# Altium PCB mainPCB_24V_placement helper.PcbDoc
Units mm, origin at the board's own origin, x right, y up, seen from the top; angles counter-clockwise.
Board outline 65 x 32.8 mm, 2 copper layers (Top Layer, Bottom Layer); 73 components, 60 nets, 344 pads, 6 vias.
Unrouted connection lines stored in the file: 2.
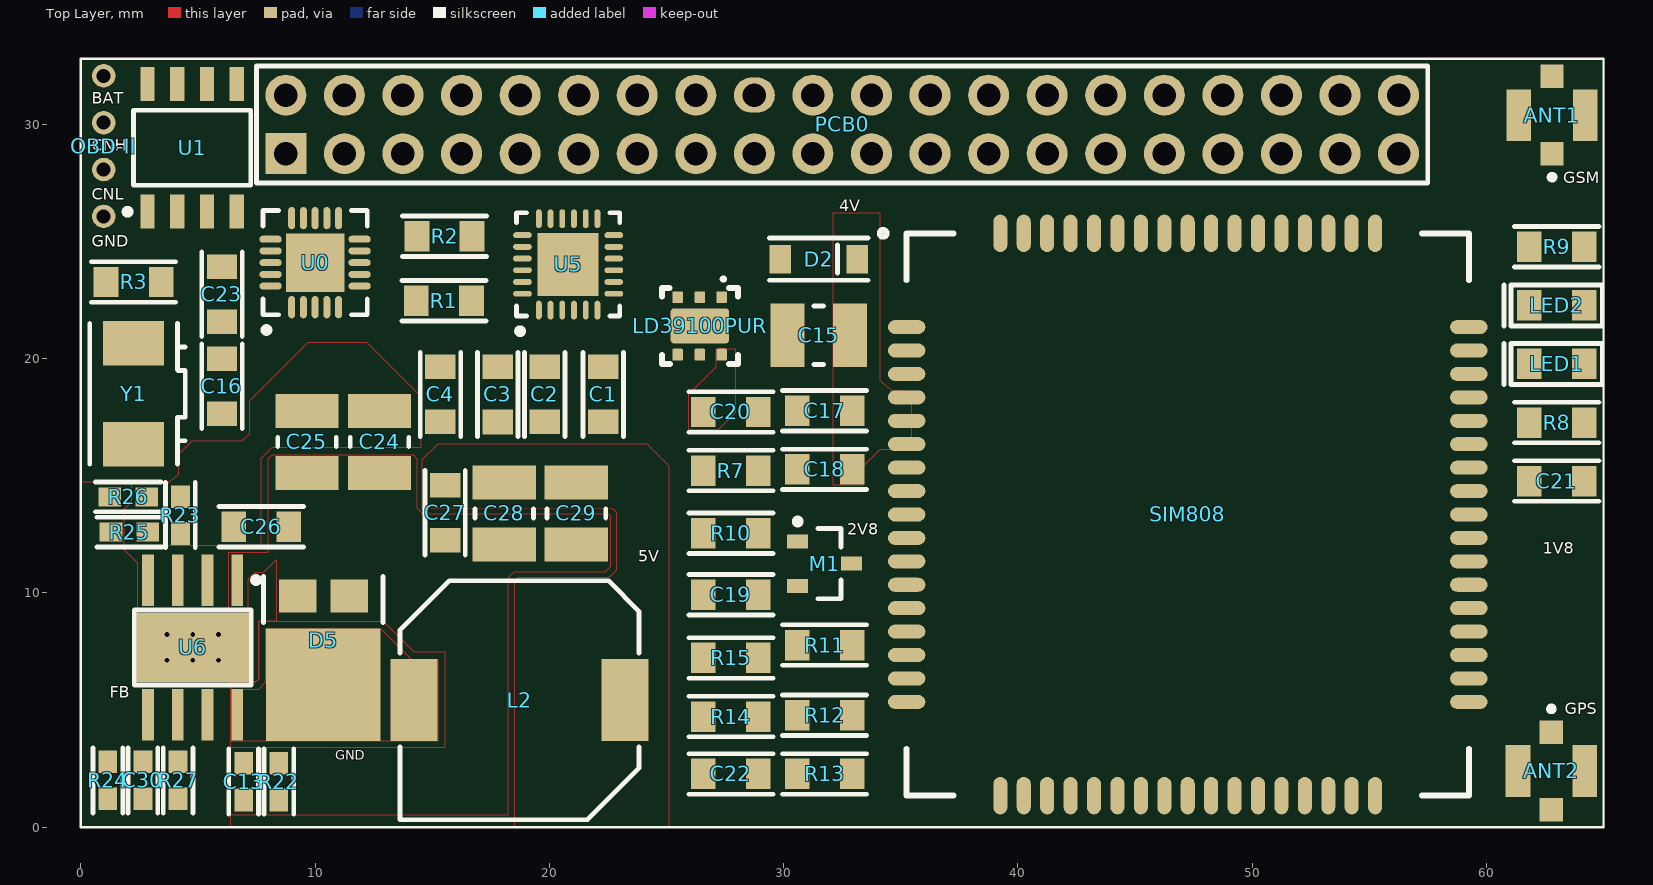
[diagram p0: Top Layer view]
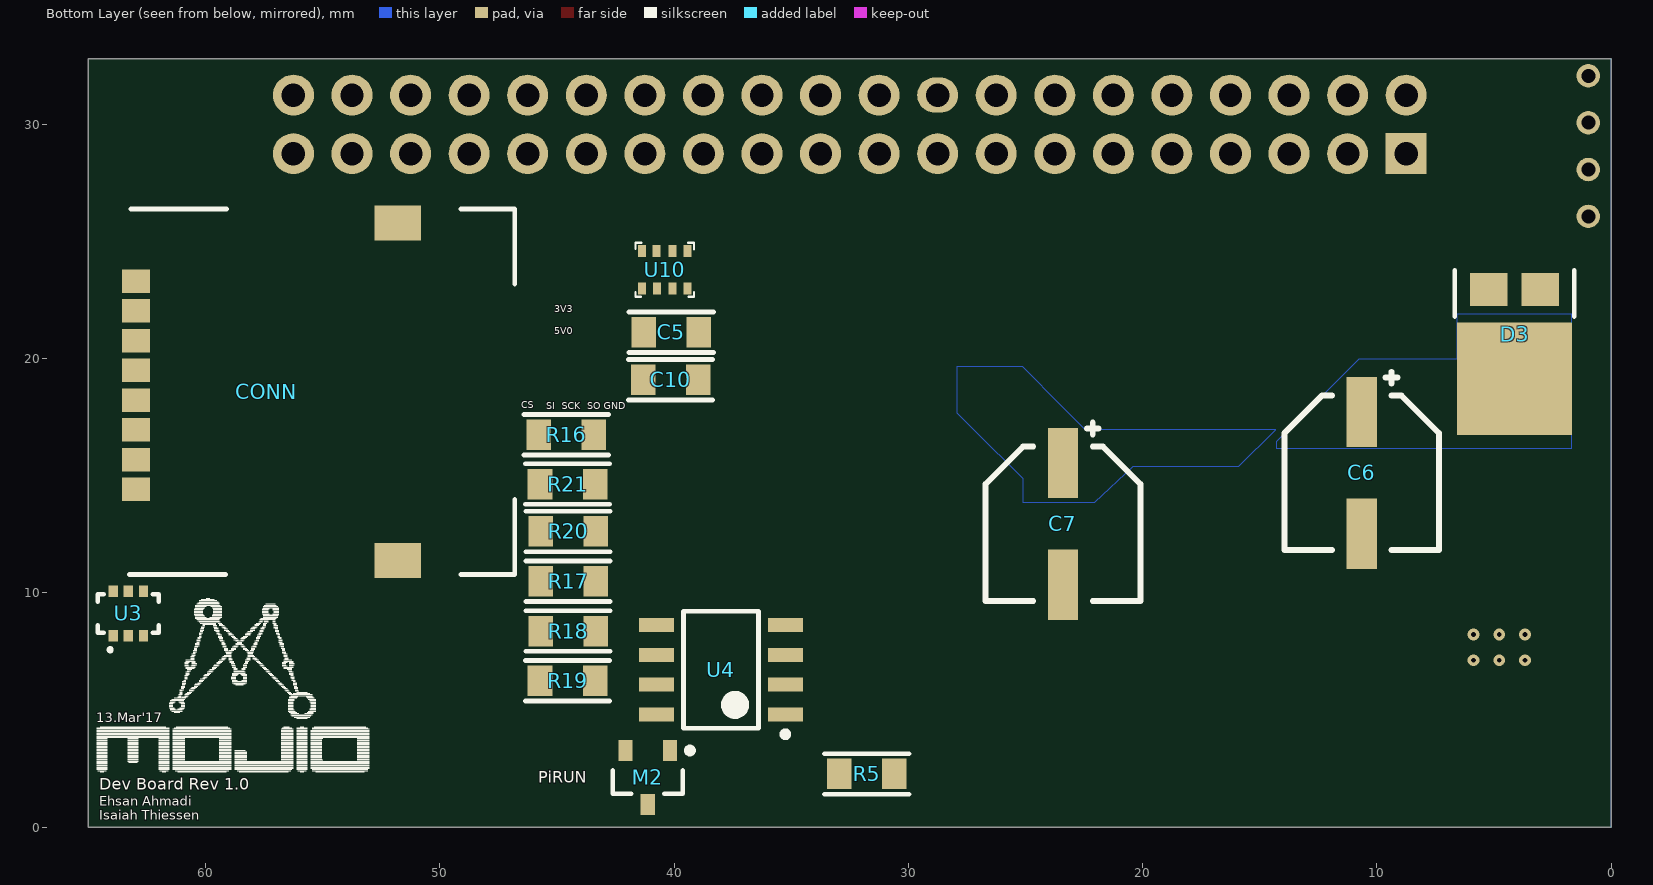
[diagram p1: Bottom Layer view, seen from below]

## Layer stack, top to bottom
Top Solder: solder mask 0.0102, Solder Resist, Dk 3.5
Top Layer: signal copper 0.0356
Dielectric 1: dielectric 0.32, FR-4, Dk 4.8
Bottom Layer: signal copper 0.0356
Bottom Solder: solder mask 0.0102, Solder Resist, Dk 3.5

## Board outline
0,0 0,32.8 65,32.8 65,0

## Design rules (kind name [scope] priority, off if disabled: settings)
Clearance [All] p1: gap=0.16
HoleSize [All] p1: absolutevalues=TRUE maxlimit=6.3 minlimit=0.2 maxpercent=80.000 minpercent=20.000
MinimumAnnularRing [All] p1: minimumring=0.15
PolygonConnect [All] p1: connectstyle=Direct reliefconductorwidth=0.254 reliefentries=4 polygonreliefangle="90 Angle" airgapwidth=0.254
RoutingVias [All] p1: holewidth=0.2 width=0.5 viastyle="Through Hole" minholewidth=0.2 minwidth=0.5 maxholewidth=10 maxwidth=10
SolderMaskExpansion [All] p1: expansion=0.102
Width [All] p1: maxlimit=12 minlimit=0.16 preferedwidth=0.2
29 further rules are at their usual default settings.

## Classes and differential pairs
component class PowerCircuit_24V: C6 C7 C13 C24 C25 C26 C27 C28 C29 C30 D5 L2 R22 R23 R24 R25 R26 R27 U6
component class SIM808: ANT1 ANT2 C15 C17 C18 C19 C20 C21 C22 CONN D2 LD39100PUR LED1 LED2 M1 R7 R8 R9 R10 R11 R12 R13 R14 R15 SIM808 U3
component class MPU6050: C1 C2 C3 C4 R1 R2 U5
component class CanNode: C16 C23 D3 OBD-II PCB0 R3 U0 U1 Y1
component class ATtiny: M2 R5 R16 R17 R18 R19 R20 R21 U4
component class bmp280_i2c: C5 C10 U10

## Components (designator, comment, footprint, x,y, rotation, side; value= is the part's Value field where it differs from the comment)
ANT1 "antenna" uFL 60.8,29.25 r0 top
ANT2 "antenna" uFL 64.775,3.55 r180 top
C1 "Generic Capacitor" 0805 22.275,18.475 r90 top
C2 "Generic Capacitor" 0805 19.775,18.475 r90 top
C3 "Generic Capacitor" 0805 17.825,18.475 r270 top
C4 "Generic Capacitor" 0805 15.325,18.475 r90 top
C5 "Generic Capacitor" 0805 40.125,21.15 r180 bottom
C6 "47uF, 25V" "Cap 6.3mm dia 5.4mm Height" 10.65,15.125 r180 bottom
C7 "47uF, 25V" "Cap 6.3mm dia 5.4mm Height" 23.4,12.95 r180 bottom
C10 "Generic Capacitor" 0805 40.15,19.125 r180 bottom
C13 "Generic Capacitor" 0603 6.95,1.95 r270 top
C15 "Cap Cer 100uF" "Cap 1210" 31.5,21 r180 top
C16 "Generic Capacitor" 0805 6,18.825 r90 top
C17 "Generic Capacitor" 0805 31.75,17.75 r180 top
C18 "Generic Capacitor" 0805 31.75,15.25 r180 top
C19 "Generic Capacitor" 0805 27.75,9.95 r0 top
C20 "Generic Capacitor" 0805 27.75,17.75 r0 top
C21 "Generic Capacitor" 0805 63,14.75 r180 top
C22 "Generic Capacitor" 0805 27.75,2.25 r180 top
C23 "Generic Capacitor" 0805 6,22.75 r90 top
C24 "Generic Capacitor" "Cap 1210" 12.75,16.45 r270 top
C25 "Generic Capacitor" "Cap 1210" 9.65,16.45 r270 top
C26 "Generic Capacitor" 0805 7.7,12.85 r0 top
C27 "Generic Capacitor" 0805 15.575,13.425 r270 top
C28 "Generic Capacitor" "Cap 1210" 18.075,13.4 r270 top
C29 "Generic Capacitor" "Cap 1210" 21.15,13.4 r270 top
C30 "Generic Capacitor" 0603 2.65,2 r90 top
CONN "CONN SMART CARD" "CONN SMART CARD" 55.1,18.59 r270 bottom
D2 "Diode Zener" "Diode Zener" 31.5,24.25 r0 top
D3 "DIODE SCHOTTKY 60V 5A" TO277A 4.125,19.15 r0 bottom
D5 "DIODE SCHOTTKY 60V 5A" TO277A 10.35,6.075 r180 top
L2 "FIXED IND 6.8UH 5.2A" 7447714068 18.725,5.425 r270 top
LD39100PUR "LD39100PUR" LD39100PUR 26.425,21.4 r180 top
LED1 "Led Red" "0805 LED" 63,19.75 r180 top
LED2 "Led Green" "0805 LED" 63,22.25 r180 top
M1 "N-CH Mosfet Switch" SOT32-3 31.75,11.25 r0 top
M2 "N-CH Mosfet Switch" SOT32-3 41.125,2.125 r270 bottom
OBD-II "OBD-II" OBD_II 0.975,29.075 r0 top
PCB0 "Rasberry Pi footprint" "Rasberry PI" 32.5,30 r0 top
R1 "Resistor" 0805 15.5,22.45 r180 top
R2 "Resistor" 0805 15.525,25.2 r180 top
R3 "Resistor" 0805 2.25,23.25 r180 top
R5 "Resistor" 0805 31.775,2.3 r180 bottom
R7 "Resistor" 0805 27.75,15.25 r0 top
R8 "Resistor" 0805 63,17.25 r180 top
R9 "Resistor" 0805 63,24.75 r180 top
R10 "Resistor" 0805 27.75,12.575 r0 top
R11 "Resistor" 0805 31.75,7.75 r180 top
R12 "Resistor" 0805 31.75,4.75 r180 top
R13 "Resistor" 0805 31.75,2.25 r180 top
R14 "Resistor" 0805 27.75,4.75 r0 top
R15 "Resistor" 0805 27.75,7.25 r0 top
R16 "Resistor" 0805 44.6,16.775 r180 bottom
R17 "Resistor" 0805 44.525,10.525 r180 bottom
R18 "Resistor" 0805 44.525,8.4 r180 bottom
R19 "Resistor" 0805 44.55,6.275 r180 bottom
R20 "Resistor" 0805 44.525,12.65 r180 bottom
R21 "Resistor" 0805 44.55,14.675 r180 bottom
R22 "Resistor" 0603 8.45,1.95 r270 top
R23 "Resistor" 0603 4.25,13.325 r90 top
R24 "Resistor" 0603 1.15,2 r90 top
R25 "Resistor" 0603 2.075,12.6 r0 top
R26 "Resistor" 0603 2.025,14.1 r0 top
R27 "Resistor" 0603 4.15,2 r270 top
SIM808 "SIM808" SIM808 47.25,13.35 r0 top
U0 "MCP2515" MCP2515 10,24.1 r90 top
U1 "TCAN332" SOIC-8 4.75,29 r90 top
U3 "TVS Diode" SMF05CT2G 63.3,9.125 r90 bottom
U4 "ATtiny13A" ATtiny13A 38,6.725 r0 bottom
U5 "MPU6050" MPU-6050 20.8,24.025 r90 top
U6 "LMR16030" LMR16030 4.775,7.675 r270 top
U10 "BMP280" bmp280_i2c 41.65,24.8 r270 bottom
Y1 "XTAL" XTAL-16.000 2.25,18.5 r270 top

## Footprints (in the part's own frame and the unit in brackets; to place one, negate y for a bottom-side part, rotate by r counter-clockwise, add the part's x,y. Pads: shape width x height; smd on the part's side, far side on the other; paste and mask are expansions set on the pad)
0603 [mm]
  rect 0.965x0.8 smd: 1(-0.787,0) 2(0.788,0)
  silkscreen extent -1.4,-0.64 1.4,0.64, body extent -0.8,-0.4 0.8,0.4, height 0.5
0805 [mm] "0805 SMD"
  rect 1.05x1.3 smd: 1(-1.174,-0.025) 2(1.175,-0.025)
  silkscreen extent -1.8,-0.89 1.8,0.84, body extent -1.45,-0.68 1.47,0.63, height 0.64
"0805 LED" [mm] "0805 SMD LED"
  rect 1.05x1.3 smd: 1(1.175,-0.025) 2(-1.174,-0.025)
  silkscreen extent -1.95,-0.9 2.25,0.85, body extent -1.45,-0.68 1.47,0.63, height 0.64
7447714068 [mm] "Fixed Inductor 6.8uH 5A"
  rect 3.5x2 smd: 0(0,4.5) 1(0,-4.5)
  silkscreen extent -5.1,-5.1 5.1,5.1, body extent -5,-5 5,5, height 4.8
ATtiny13A [mm]
  rect 1.5x0.6 smd: 1(-2.75,1.905) 2(-2.75,0.635) 3(-2.75,-0.635) 4(-2.75,-1.905) 5(2.75,-1.905) 6(2.75,-0.635) 7(2.75,0.635) 8(2.75,1.905)
  silkscreen extent -2.87,-2.5 1.6,2.88, body extent -3.02,-2.5 3.02,2.5, height 1.75
bmp280_i2c [mm] "pressure sensor"
  rect 0.5x0.35 smd: CSB(1.8,1.575) GND(0.2,1.575) GND(1.8,2.225) SCK(1.8,0.275) SDI(1.8,0.925) SDO(0.2,0.275) VDD(0.2,2.225) VDDIO(0.2,0.9)
  silkscreen extent -0.15,0 2.15,2.5, body extent 0,0 2.01,2.49, height 1
"Cap 6.3mm dia 5.4mm Height" [mm] "Cap 6.3mm dia 5.4mm Height"
  rect 1.3x3 smd: 1(0,2.6) 2(0,-2.6)
  silkscreen extent -3.3,-3.3 3.3,4.32, body extent -3.15,-3.15 3.15,3.15, height 5.3
"Cap 1210" [mm] "1210 (3225m)"
  rect 1.45x2.7 smd: 1(-1.325,0) 2(1.325,0)
  silkscreen extent -0.2,-1.25 0.2,1.25, body extent -1.7,-1.35 1.7,1.35, height 2.5
"CONN SMART CARD" [mm] "Micro Sim connector"
  rect 1x1.2 smd: 1(-4.725,-7.875) 2(-2.185,-7.875) 3(0.355,-7.875) 4(2.895,-7.875) 5(-3.455,-7.875) 6(-0.915,-7.875) 7(1.625,-7.875) 8(4.165,-7.875)
  rect 1.5x2 smd: *(-7.2,3.3) *(7.2,3.3)
  silkscreen extent -7.8,-8.15 7.8,8.3, body extent -7.7,-8.15 7.7,8.15, height 1.9
"Diode Zener" [mm]
  rect 0.91x1.22 smd: 1(1.637,0) 2(-1.637,0)
  silkscreen extent -2.1,-0.9 2.1,0.9, body extent -2,-0.8 2,0.8, height 1.2
LD39100PUR [mm]
  rrect20% 0.45x0.5 smd: 1(-0.925,-1.225) 2(0,-1.225) 3(0.95,-1.225) 4(0.95,1.225) 5(0,1.225) 6(-0.925,1.225)
  rrect20% 2.5x1.5 smd: 2(0,0)
  silkscreen extent -1.63,-2.02 1.63,1.62, body extent -1.5,-1.5 1.5,1.5, height 1
LMR16030 [mm]
  rect 2.2x0.5 smd: 1(-2.875,1.905) 2(-2.875,0.635) 3(-2.875,-0.635) 4(-2.875,-1.905) 5(2.875,-1.905) 6(2.875,-0.635) 7(2.875,0.635) 8(2.875,1.905)
  rect 2.95x4.9 smd: 9(0,0)
  silkscreen extent -3,-2.5 1.6,2.83, body extent -3.02,-2.5 3.02,2.5, height 1.75
MCP2515 [mm] "IC CAN CTLR W/SPI 2.0B 20-QFN"
  oval 0.95x0.3 smd: 1(-1.9,1) 2(-1.9,0.5) 3(-1.9,0) 4(-1.9,-0.5) 5(-1.9,-1) 11(1.9,-1) 12(1.9,-0.5) 13(1.9,0) 14(1.9,0.5) 15(1.9,1)
  oval 0.3x0.95 smd: 6(-1,-1.9) 7(-0.5,-1.9) 8(0,-1.9) 9(0.5,-1.9) 10(1,-1.9) 16(1,1.9) 17(0.5,1.9) 18(0,1.9) 19(-0.5,1.9) 20(-1,1.9)
  rect 2.5x2.5 smd: 21(0,0)
  silkscreen extent -3,-2.23 2.23,2.22, body extent -2.12,-2.12 2.13,2.13, height 1
MPU-6050 [mm]
  oval 0.8x0.25 smd: 1(-1.95,1.25) 2(-1.95,0.75) 3(-1.95,0.25) 4(-1.95,-0.25) 5(-1.95,-0.75) 6(-1.95,-1.25) 13(1.95,-1.25) 14(1.95,-0.75) 15(1.95,-0.25) 16(1.95,0.25) 17(1.95,0.75) 18(1.95,1.25)
  oval 0.25x0.8 smd: 7(-1.25,-1.95) 8(-0.75,-1.95) 9(-0.25,-1.95) 10(0.25,-1.95) 11(0.75,-1.95) 12(1.25,-1.95) 19(1.25,1.95) 20(0.75,1.95) 21(0.25,1.95) 22(-0.25,1.95) 23(-0.75,1.95) 24(-1.25,1.95)
  rect 2.7x2.6 smd: 25(0,0)
  silkscreen extent -2.97,-2.2 2.2,2.2, body extent -2.05,-2.05 2.05,2.05, height 0.95
OBD_II [mm]
  round 1 hole 0.6: 1(0,3) 2(0,1) 3(0,-1) 4(0,-3)
"Rasberry PI" [mm] "Rasberry PI footprint"
  rect 1.75x1.75 hole 1: 1(-23.75,-1.25)
  round 1.75 hole 1: 2(-23.75,1.25) 3(-21.25,-1.25) 4(-21.25,1.25) 5(-18.75,-1.25) 6(-18.75,1.25) 7(-16.25,-1.25) 8(-16.25,1.25) 9(-13.75,-1.25) 10(-13.75,1.25) 11(-11.25,-1.25) 12(-11.25,1.25) 13(-8.75,-1.25) 14(-8.75,1.25) 15(-6.25,-1.25) 16(-6.25,1.25) 17(-3.75,-1.25) 19(-1.25,-1.25) 20(-1.25,1.25) 21(1.25,-1.25) 22(1.25,1.25) 23(3.75,-1.25) 24(3.75,1.25) 25(6.25,-1.25) 26(6.25,1.25) 27(8.75,-1.25) 28(8.75,1.25) 29(11.25,-1.25) 30(11.25,1.25) 31(13.75,-1.25) 32(13.75,1.25) 33(16.25,-1.25) 34(16.25,1.25) 35(18.75,-1.25) 36(18.75,1.25) 37(21.25,-1.25) 38(21.25,1.25) 39(23.75,-1.25) 40(23.75,1.25)
  oval 1.75x1.5 hole 1: 18(-3.75,1.25)
  silkscreen extent -25,-2.5 25,2.5
SIM808 [mm]
  oval 1.6x0.6 smd: 1(-12,8) 2(-12,7) 3(-12,6) 4(-12,5) 5(-12,4) 6(-12,3) 7(-12,2) 8(-12,1) 9(-12,0) 10(-12,-1) 11(-12,-2) 12(-12,-3) 13(-12,-4) 14(-12,-5) 15(-12,-6) 16(-12,-7) 17(-12,-8) 35(12,-8) 36(12,-7) 37(12,-6) 38(12,-5) 39(12,-4) 40(12,-3) 41(12,-2) 42(12,-1) 43(12,0) 44(12,1) 45(12,2) 46(12,3) 47(12,4) 48(12,5) 49(12,6) 50(12,7) 51(12,8)
  oval 0.6x1.6 smd: 18(-8,-12) 19(-7,-12) 20(-6,-12) 21(-5,-12) 22(-4,-12) 23(-3,-12) 24(-2,-12) 25(-1,-12) 26(0,-12) 27(1,-12) 28(2,-12) 29(3,-12) 30(4,-12) 31(5,-12) 32(6,-12) 33(7,-12) 34(8,-12) 52(8,12) 53(7,12) 54(6,12) 55(5,12) 56(4,12) 57(3,12) 58(2,12) 59(1,12) 60(0,12) 61(-1,12) 62(-2,12) 63(-3,12) 64(-4,12) 65(-5,12) 66(-6,12) 67(-7,12) 68(-8,12)
  silkscreen extent -13.14,-12 12,12.14
SMF05CT2G [mm] "SOT-363"
  rect 0.5x0.4 smd: 1(-0.95,0.65) 2(-0.95,0) 3(-0.95,-0.65) 4(0.95,-0.65) 5(0.95,0) 6(0.95,0.65)
  silkscreen extent -1.57,-1.3 0.83,1.3, body extent -0.72,-1.2 0.72,1.2, height 1.1
SOIC-8 [mm] "DMP3037LSS"
  rect 1.45x0.6 smd: 1(-2.725,1.905) 2(-2.725,0.635) 3(-2.725,-0.635) 4(-2.725,-1.905) 5(2.725,-1.905) 6(2.725,-0.635) 7(2.725,0.635) 8(2.725,1.905)
  silkscreen extent -2.85,-2.5 1.6,2.88, body extent -3,-2.5 3,2.5, height 1.75
SOT32-3 [mm] "SOT23, 3-Leads, Body 2.90x2.30mm, Pitch 0.95mm, IPC Medium Density"
  rect 0.9x0.6 smd: 1(-1.15,0.95) 2(-1.15,-0.95) 3(1.15,0)
  silkscreen extent -1.27,-1.5 0.7,1.92, body extent -0.7,-1.5 0.7,1.5, height 1.1
TO277A [mm]
  rect 1.6x1.4 smd: 1(1.1,-3.8) 2(-1.1,-3.8)
  rect 4.9x4.8 smd: 3(0,0)
  silkscreen extent -2.55,-4.62 2.55,-2.65, body extent -2.38,-4.38 2.35,2.4, height 1.2
uFL [mm]
  rect 1.05x2.2 smd: 0(0.575,1.15) 0(3.425,1.15)
  rect 1x1 smd: 0(2,2.8) 1(2,-0.5)
  silkscreen extent 1.9,-1.6 2.1,-1.4, body extent 0.7,-0.15 3.3,2.45, height 0.36
XTAL-16.000 [mm]
  rect 1.9x2.6 smd: 0(-2.15,0) 1(2.15,0)
  silkscreen extent -3,-1.87 3,2.2, body extent -3,-1.75 3,1.75, height 1.4

## Part data
ANT1 ANT2: "uFL SMT Antenna Connector"
C1 C2 C3 C4 C5 C10 C13 C16 C17 C18 C19 C20 C21 C22 C23 C24 C25 C26 C27 C28 C29 C30: library part Capacitor, "Generic capacitor"
C6 C7: library part 865080443007, "Polorised capacitor 47uF, 25V"
C15: library part LMK325ABJ107MM-P, "CAP CER 100UF 10V X5R 1210"
D2: library part MMSZ5231BT1G, "DIODE ZENER 5.1V 500MW SOD123"
D3 D5: library part SS5P6-M3/86A, "DIODE SCHOTTKY 60V 5A TO277A"
L2: library part 7447714068, "FIXED IND 6.8UH 5.2A 22 MOHM SMD"
LD39100PUR: "Adjustable linear voltage regulator"
LED1: library part LTST-C171EKT, "LED RED CLEAR 0805 SMD"
LED2: library part LTST-C170GKT, "LED GREEN CLEAR 0805 SMD"
M1 M2: library part BSH105,215, "MOSFET N-CH 20V 1.05A SOT23"
PCB0: library part "Rasberry Pi"
R1 R2 R3 R5 R7 R8 R9 R10 R11 R12 R13 R14 R15 R16 R17 R18 R19 R20 R21 R22 R23 R24 R25 R26 R27: "Generic Resistor"
SIM808: "SIM808 GSM + GPRS + GPS Cellular Module"
U0: "IC CAN CTLR W/SPI 2.0B 20-QFN"
U1: "IC TXRX CAN 8SOIC"
U3: library part SMF05CT2G, "TVS DIODE 5VWM 12.5VC SOT363"
U5: "IMU ACCEL/GYRO 3-AXIS I2C 24QFN"
U6: "IC REG BUCK ADJ 3A 8SOPWRPD"
Y1: library part XTAL-16.000, "XTAL16.0000MHZ 18PF SMD"

## Via types
v1: diameter 0.5, hole 0.2, Top Layer to Bottom Layer, 6 vias

## Nets (pads, with @x,y where several pads share a name; then routed paths per layer and width w, separated by ;. In a path a pad name is that pad's centre, name@x,y a point inside that pad or via, vN(x,y) a via of type N, cw(c..) or ccw(c..) an arc to the next point about the centre after c; other vN are vias at no path point)
808_PWR: M1.1 PCB0.16
808_RESET: PCB0.15 R15.2 SIM808.16
808_RXD: PCB0.8 R13.2 R14.2
808_TXD: PCB0.10 R12.2
6050_SCL: PCB0.5 R2.1 U5.23
6050_SDA: PCB0.3 R1.1 U5.24
+1.8V: C21.1 CONN.1 SIM808.29 U3.5
+2.8V: R11.2 SIM808.7
+3.3V: C3.1 C4.2 C5.1 C10.1 PCB0.1 PCB0.17 R1.2 R2.2 U0.18 U1.3 U5.8 U5.13 U10.VDD U10.VDDIO
+4V: C15.1 C17.1 C18.1 C19.2 D2.1 LD39100PUR.4 R7.1 SIM808.4 SIM808.5 SIM808.6
+5V: C7.1 C20.1 C27.1 C28.1 C29.1 C30.1 L2.0 LD39100PUR.1 LD39100PUR.6 PCB0.2 PCB0.4 R24.1 U4.8
+12V: C6.1 C24.1 C25.1 C26.1 D3.3 R5.2 R23.2 U6.2
AT_RST: PCB0.12 R16.1
AT_SCK: PCB0.40 R17.1
AT_SI: PCB0.38 R20.1
AT_SO: PCB0.35 R18.1 R21.1
BAT_UR: D3.1 D3.2 OBD-II.1
CS: PCB0.24 U0.16 U10.CSB
GND: ANT1.0 ANT2.0 C1.1 C2.1 C3.2 C4.1 C5.2 C6.2 C7.2 C10.2 C15.2 C16.2 C17.2 C18.2 C19.1 C20.2 C21.2 C22.2 C23.2 C24.2 C25.2 C26.2 C27.2 C28.2 C29.2 CONN.5 D2.2 D5.1 D5.2 LD39100PUR.2 LED1.1 LED2.1 M1.2 M2.2 OBD-II.4 PCB0.6 PCB0.9 PCB0.14 PCB0.20 PCB0.25 PCB0.30 PCB0.34 PCB0.39 R10.1 R14.1 R15.1 R19.1 R21.2 R25.1 R26.1 R27.2 SIM808.1 SIM808.2 SIM808.3 SIM808.18 SIM808.28 SIM808.34 SIM808.36 SIM808.40 SIM808.51 SIM808.52 SIM808.54 SIM808.64 SIM808.65 SIM808.67 SIM808.68 U0.8 U1.2 U3.2 U4.4 U5.1 U5.11 U5.18 U6.7 U6.9 U10.GND
  other v1: 3.675,7.125 4.775,7.125 5.875,7.125 3.675,8.225 4.775,8.225 5.875,8.225
GPS_RF: ANT2.1 SIM808.35
GSM_RF: ANT1.1 SIM808.66
MCP_INT: PCB0.32 U0.11
NetC1_2: C1.2 U5.10
NetC2_2: C2.2 U5.20
NetC13_1: C13.1 U6.1
NetC13_2: C13.2 R22.2
NetC16_1: C16.1 U0.6 Y1.1
NetC22_1: C22.1 SIM808.17
NetC23_1: C23.1 U0.7 Y1.0
NetC30_2: C30.2 R24.2 R27.1 U6.5
NetD5_3: D5.3 L2.1 R22.1 U6.8
NetLD39100PUR_5: LD39100PUR.5 R7.2 R10.2
NetLED1_2: LED1.2 R8.1
NetLED2_2: LED2.2 R9.1
NetM1_3: M1.3 SIM808.8
NetM2_1: M2.1 U4.3
NetOBD-II_2: OBD-II.2 U1.7
NetOBD-II_3: OBD-II.3 U1.6
NetR3_1: R3.1 U0.17
NetR3_2: R3.2 U0.19 U1.1
NetR5_1: R5.1 R19.2 U4.2
NetR8_2: R8.2 SIM808.49
NetR9_2: R9.2 SIM808.50
NetR11_1: R11.1 SIM808.13
NetR12_1: R12.1 SIM808.14
NetR13_1: R13.1 SIM808.15
NetR16_2: R16.2 U4.1
NetR17_2: R17.2 U4.7
NetR18_2: R18.2 U4.6
NetR20_2: R20.2 U4.5
NetR23_1: R23.1 R25.2 U6.3
NetR26_2: R26.2 U6.4
NetU0_20: U0.20 U1.4
PIRUN: M2.3
SCK: PCB0.23 U0.12 U10.SCK
SI: PCB0.19 U0.14 U10.SDI
SIMCLK: CONN.3 SIM808.31 U3.3
SIMDATA: CONN.7 SIM808.30 U3.6
SIMRST: CONN.2 SIM808.32 U3.1
SO: PCB0.21 U0.15 U10.SDO
pads on no net: CONN.4 CONN.6 CONN.8 CONN.* LD39100PUR.3 PCB0.7 PCB0.11 PCB0.13 PCB0.18 PCB0.22 PCB0.26 PCB0.27 PCB0.28 PCB0.29 PCB0.31 PCB0.33 PCB0.36 PCB0.37 SIM808.9 SIM808.10 SIM808.11 SIM808.12 SIM808.19 SIM808.20 SIM808.21 SIM808.22 SIM808.23 SIM808.24 SIM808.25 SIM808.26 SIM808.27 SIM808.33 SIM808.37 SIM808.38 SIM808.39 SIM808.41 SIM808.42 SIM808.43 SIM808.44 SIM808.45 SIM808.46 SIM808.47 SIM808.48 SIM808.53 SIM808.55 SIM808.56 SIM808.57 SIM808.58 SIM808.59 SIM808.60 SIM808.61 SIM808.62 SIM808.63 U0.1 U0.2 U0.3 U0.4 U0.5 U0.9 U0.10 U0.13 U0.21 U1.5 U1.8 U3.4 U5.2 U5.3 U5.4 U5.5 U5.6 U5.7 U5.9 U5.12 U5.14 U5.15 U5.16 U5.17 U5.19 U5.21 U5.22 U5.25 U6.6

## Polygon pours and split planes (outlines as drawn)
GND on Top Layer "enable" (solid, shelved, pour order 38): 2.15,14.75 2.15,13.875 1.825,13.55 1.825,11.875 2.4,11.3 2.4,9.175 2.4,6.6 6.375,6.6 6.375,0 0,0 0,14.75
GND on Top Layer "enable" (solid, shelved, pour order 37): 8.35,8.8 7.6,8.8 7.6,6.325 7.475,6.2 7.15,6.2 7.15,10.575 7.45,10.875 7.725,10.875 7.8,10.875 8.35,11.425
NetD5_3 on Top Layer "enable" (solid, shelved, pour order 36): 15.225,3.675 6.425,3.675 6.425,5.9 7.6,5.9 7.9,6.2 7.9,8.475 12.8,8.475 14.1,7.175 15.225,7.175
+12V on Top Layer "enable" (solid, shelved, pour order 33): 14.5,16.2 8.15,16.2 7.675,15.725 7.675,12.025 3.638,12.025 3.638,14.637 4.175,15.075 4.175,15.925 4.75,16.5 6.9,16.5 7.2,16.8 7.2,18.2 9.7,20.7 12.2,20.7 14.5,18.4 14.5,16.5
+5V on Top Layer "Top Layer-No Net" (solid, shelved, pour order 4): 27.125,20.425 27.925,20.425 27.925,19.375 27.925,17.7 27.2,16.975 25.95,16.975 25.95,18.475 27.125,19.65 27.125,20.425
+4V on Top Layer "Top Layer-No Net" (solid, shelved, pour order 2): 35.475,18.6 34.625,18.65 34.125,19.032 34.125,26.2 32.1,26.2 32.1,14.675 32.1,14.625 33.425,14.625 33.425,15.425 34.125,16.125 35.475,16.125
+5V on Top Layer "enable" (solid, shelved, pour order 34): 14.575,13.575 14.575,15.7 15.25,16.375 24.15,16.375 25.1,15.425 25.1,0 18.55,0 18.525,-0.025 18.525,10.5 18.7,10.675 22.55,10.675 22.875,11 22.875,13.425 22.7,13.6
GND on Top Layer "enable" (solid, shelved, pour order 35): 14.225,15.875 8.15,15.875 7.975,15.7 7.975,11.725 6.3,11.725 6.3,6.2 7.475,6.2 7.6,6.325 7.6,8.8 8.725,8.8 12.9,8.8 14.2,7.5 15.525,7.5 15.525,3.4 6.3,3.4 6.3,0.525 18.25,0.525 18.25,10.65 18.5,10.9 22.375,10.9 22.625,11.15 22.625,12.025 22.625,13.25 22.525,13.35 14.625,13.35 14.35,13.625 14.35,15.7
+12V on Bottom Layer "enable" (solid, shelved, pour order 32): 1.675,21.9 6.6,21.9 6.6,19.975 10.775,19.975 14.3,16.45 14.3,16.175 7.975,16.175 1.675,16.175
+5V on Bottom Layer "5V" (solid, shelved, pour order 18): 27.125,19.65 27.925,19.65 27.925,17.7 27.2,16.975 25.125,14.9 25.125,13.875 22.05,13.875 20.4,15.4 15.9,15.4 14.325,16.975 22.45,16.975 23.425,17.95 25.125,19.65
GND on Bottom Layer "GND_PLANE" (solid, remove dead copper, shelved, pour order 39): 0,0 0,32.8 65,32.8 65,0 26.875,0 25.3,0

## Silkscreen, mask and mechanical layers (free items; w line width, h text height)
Top Overlay:
  the board outline again, w0.1
  text "GSM" at 63.275,27.5 h0.5
  text "4V" at 32.375,26.3 h0.5
  text "2V8" at 32.725,12.475 h0.5
  text "1V8" at 62.4,11.675 h0.5
  text "5V" at 23.8,11.325 h0.5
  text "FB" at 1.225,5.525 h0.5
  text "GPS" at 63.35,4.825 h0.5
  text "GND" at 10.85,2.875 h0.4
Bottom Overlay:
  drawing of 741 lines, arcs and shapes, not listed
  text "3V3" at 45.125,21.975 h0.3
  text "5V0" at 45.125,21.05 h0.3
  text "CS" at 46.525,17.875 h0.3
  text "GND" at 43,17.85 h0.3
  text "SO" at 43.7,17.85 h0.3
  text "SCK" at 44.8,17.85 h0.3
  text "SI" at 45.45,17.85 h0.3
  text "13.Mar'17" at 64.675,4.475 h0.4
  text "PiRUN" at 45.8,1.9 h0.5
  text "Dev Board Rev 1.0" at 64.55,1.6 h0.5
  text "Ehsan Ahmadi" at 64.55,0.925 h0.4
  text "Isaiah Thiessen" at 64.55,0.325 h0.4

## Text inside footprints (layer, text, board x,y; h text height)
OBD-II: Top Overlay "BAT" at 0.475,30.875 h0.5; Top Overlay "CNL" at 0.475,26.775 h0.5; Top Overlay "CNH" at 0.475,28.875 h0.5; Top Overlay "GND" at 0.475,24.775 h0.5